# Altium PCB ESP232_USB_C_V1_2..PcbDoc (part 3 of 3)
Units mil, origin at the board's own origin, x right, y up, seen from the top; angles counter-clockwise.
Board outline 2700 x 1000 mil, 4 copper layers (L1, L2, L3, L4), stack 24.38 mil thick; 64 components, 73 nets, 299 pads, 169 vias.
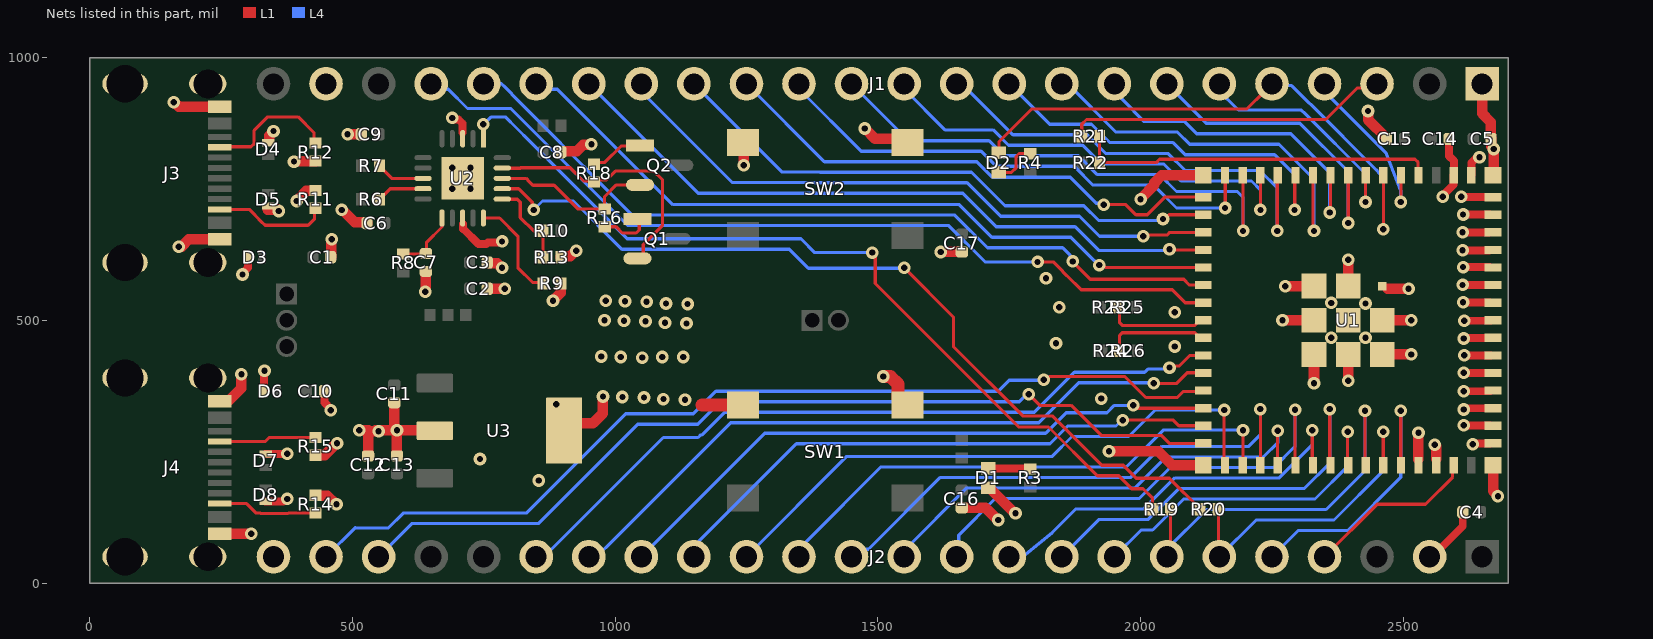
[diagram p4: the nets of this part, all layers, seen from the top]

## Via types
v1: diameter 24, hole 12, L1 to L4, tented both sides, 169 vias

## Nets (pads, with @x,y where several pads share a name; then routed paths per layer and width w, separated by ;. In a path a pad name is that pad's centre, name@x,y a point inside that pad or via, vN(x,y) a via of type N, cw(c..) or ccw(c..) an arc to the next point about the centre after c; other vN are vias at no path point) (continued)
CON_GPIO0: J1.3 R21.1 | length 616.9
  L1 w6: R21.1@1887.99,850 1887.99,872.99 1897,882 2352,882 2411.77,941.77 2441.77,941.77 J1.3@2450,950
DTR_FTDI: Q2.2 R16.1 U2.18 | length 312
  L1 w6: U2.18@785.41,770 830.71,770 837.05,763.66 843.71,757 884,757 928.99,712.01 R16.1@980,712.01 980,735 1002.6,757.6 1037.4,757.6 Q2.2@1040,755
ESP_USB_N: R23.2 R25.2 U1.23 | length 192.9
  L1 w6.03: R23.2@1960,521.87 1960,495.28 1965,490.28 2103.18,490.28 2106.72,493.82 2106.72,495.14 2111.57,500 U1.23@2119.45,500
ESP_USB_P: R24.2 R26.2 U1.24 | length 195.7
  L1 w6.03: R26.2@1959.98,441.87 1960,471.25 1965,476.25 2103.18,476.25 2106.72,472.72 2106.72,471.39 2111.57,466.54 U1.24@2119.45,466.54
FTDI_RESET: C7.2 R8.2 U2.11 | length 123.3
  L1 w6: R8.2@597,626.02 639.09,626.02 C7.2@640,626.93 ; C7.2@640.88,626.97 640.88,647.7 670.63,677.45 U2.11@670.63,694.59
FTDI_USB_N: R6.2 U2.9 | length 91.7
  L1 w6.03: R6.2@552.01,730 552.01,731.18 559.62,738.8 560.8,738.8 572.32,750.32 U2.9@634.59,750.32
FTDI_USB_P: R7.2 U2.8 | length 93.2
  L1 w6.03: R7.2@552.01,794 552.01,792.82 574.83,770 U2.8@634.59,770
GND: C1.1 C2.1 C3.1 C4.1 C5.1 C6.1 C7.1 C8.1 C9.1 C10.1 C11.1 C12.1 C13.1 C14.1 C15.1 C16.1 C17.1 D1.1 D3.1 D4.1 D5.1 D6.1 D7.1 D8.1 J1.1 J1.23 J2.2 J2.24 J3.A1B12 J3.B1A12 J3.S1 J3.S2 J3.S3 J3.S4 J4.A1B12 J4.B1A12 J4.S1 J4.S2 J4.S3 J4.S4 R9.2 R11.1 R12.1 R13.2 R14.1 R15.1 SW1.3 SW1.4 SW2.3 SW2.4 U1.1 U1.2 U1.42 U1.43 U1.46 U1.47 U1.48 U1.49 U1.50 U1.51 U1.52 U1.53 U1.54 U1.55 U1.56 U1.57 U1.58 U1.59 U1.60 U1.61 U1.62 U1.63 U1.64 U1.65 U1.66 U1.67 U1.68 U1.69 U1.70 U1.71 U1.72 U1.73 U2.3 U2.13 U2.21 U3.2 U3.4 | length 4259.2
  L1 w15: v1(291,587) 291,589.44 301.59,600.03 D3.1@301.59,615.69 ; v1@332,399 332.2,398.8 D6.1@332.2,365 ; D8.1@335,155 368.56,155 373.56,160 v1(376,160) ; D7.1@335,245.59 v1@375.59,245.59 ; C10.1@446.93,363.82 446.93,343.51 459,331.44 v1(459,329) ; v1(690,885) 692.68,882.32 701.81,882.32 710,874.14 U2.3@710,856.94 ; U2.13@711,683 711,674 740,645 755,645 758.28,648.28 783.28,648.28 v1(785,650) ; C15.1@2468.07,845 C15.1@2468.07,846.18 ; 2575,70 2613.07,108.07 C4.1@2613.07,135 ; v1(2575,735) 2575,737.44 2595.45,757.89 2595.45,775.22 U1.2@2595.83,775.59 ; C14.1@2586.93,845 2586.93,812.56 2596.2,803.29 U1.2@2596.2,775.96 ; v1(2610,735) 2610.37,734.63 2663.45,734.63 U1.60@2664.08,734 ; v1@2612.92,567 U1.55@2663.08,567 ; v1@2612.92,633 U1.57@2663.08,633 ; v1@2612.92,667 U1.58@2663.08,667 ; v1@2613.92,534 U1.54@2664.08,534 ; v1@2613.92,601 U1.56@2664.08,601 ; v1@2613.92,701 U1.59@2664.08,701 ; v1(2614.7,330.22) 2617.17,332.68 U1.48@2670.63,332.68 ; v1(2614.7,465.22) 2616.02,466.54 U1.52@2670.63,466.54 ; v1@2614.92,300 U1.47@2665.08,300 ; v1@2614.92,365 U1.49@2665.08,365 ; v1@2614.92,400 U1.50@2665.08,400 ; v1@2615.92,433 U1.51@2666.08,433 ; v1@2615.92,499 U1.53@2666.08,499 ; U1.1@2629.29,775.59 2629.67,775.96 2629.67,799.67 2640,810 v1(2645,810) ; v1(2632,264) 2633.37,265.37 U1.46@2665.08,265.37
  L1 w20: v1(160,915) 161.08,915 170.18,905.91 J3.A1B12@247.64,905.91 ; v1(170,640) 175,640 188.94,653.94 J3.B1A12@247.64,653.94 ; J4.B1A12@247.64,94.09 306.91,94.09 v1@307,94 ; J4.A1B12@247.64,346.06 249.45,347.87 265.87,347.87 289,371 v1(289,397) ; D5.1@339.23,710.77 357.23,710.77 v1(360,708) ; 341.81,847 341.81,850.73 350,858.92 v1(350,860) ; v1(389,802) 389.5,802.5 429.5,802.5 R12.1@430,802.99 ; v1(394,727) 394,727.72 412.66,746.38 429.37,746.38 R11.1@430,747.01 ; R14.1@429.48,167.01 430.11,166.38 452.54,166.38 468.92,150 v1(470,150) ; R15.1@430,242.99 430.63,243.62 447.54,243.62 469.92,266 v1(471,266) ; C1.1@459.49,621.18 459.49,651.41 461,652.92 v1(461,654) ; v1(480,710) 481.08,710 504.27,686.81 527.44,686.81 528.07,686.18 C6.1@528.07,685 ; v1(491,854) C9.1@517.07,854 ; v1(513,291) 513.5,290.5 530,290.5 ; C12.1@530,241.93 530,289 v1(550,289) ; v1@545,290.5 v1@585,290.5 ; C11.1@580,343.07 580,297.08 585,292.08 v1(585,291) v1@585,290.5 ; C13.1@585,241.93 v1@585,290.5 ; v1(639,554) 639.5,554.5 639.5,592.57 C7.1@640,593.07 ; U3.2@656.97,290 656.47,290.5 v1@585,290.5 ; C2.1@756.93,560 v1(790,560) ; C3.1@756.93,610 756.93,608.82 757.56,608.19 775.73,608.19 783.92,600 v1(785,600) ; v1(882,537) 882,538.08 896.38,552.46 896.38,569.37 R9.2@897.01,570 ; C8.1@896.93,820 896.93,821.18 897.56,821.81 926.81,821.81 939.23,834.23 954.23,834.23 v1(955,835) ; R13.2@897.01,620 897.01,621.18 897.64,621.81 914.73,621.81 924.92,632 v1(926,632) ; U3.4@903.03,290 917.03,304 958,304 977,323 v1(977,355) ; SW2.4@1243.5,838.58 1245,837.09 v1(1245,795) ; v1(1475,865) 1495,845 1550.08,845 SW2.3@1556.5,838.58 ; v1(1620,630) C17.1@1660,630 ; C16.1@1660,143.07 1704.85,143.07 1727.92,120 v1(1729,120) ; D1.1@1710,181.3 1711.81,179.49 1713.78,179.49 1759.33,133.93 1761.07,133.93 v1(1762,133) ; v1(1940,251) 2034,251 2060.59,224.41 U1.64@2119.45,224.41 ; v1(2000,730) 2000,731.08 2026.45,757.53 2026.45,761.45 2040.59,775.59 U1.63@2119.45,775.59 ; v1(2270,500) U1.72@2330.08,500 ; v1(2275,565) v1(2275,565) U1.71@2330.08,564.96 ; v1@2330,390 2330,434.96 U1.73@2330.08,435.04 ; v1(2395,385) 2395,390 2395.04,390.04 U1.70@2395.04,435.04 ; v1(2395,615) v1(2395,615) U1.69@2395.04,564.96 ; v1(2432.77,898.23) 2432.77,881.49 C15.1@2468.07,846.18 ; U1.68@2460,435.04 v1(2514.96,435.04) v1(2514.96,435.04) ; U1.67@2460,500 v1(2515,500) ; 2470,560 v1@2500,560 ; U1.42@2528.71,235.63 v1@2528.71,285.78 ; v1(2560,263) 2560,262.84 2562.68,260.16 U1.43@2562.68,236.53 ; J1.1@2650,950 2650,893.5 2666.3,877.2 2666.3,846.81 2666.93,846.18 C5.1@2666.93,845 ; C5.1@2667.56,844.37 2667.56,831.52 2672,827.08 v1(2672,826) 2672,776.96 U1.62@2670.63,775.59 ; U1.65@2670.63,224.41 2670.63,175.45 2680,166.08 v1(2680,165)
  L1 w25: 1166,338.58 SW1.4@1243.5,338.58 ; v1(1510.5,393) 1523.84,393 1538.48,378.36 1538.48,351.67 1551.57,338.58 SW1.3@1556.5,338.58
  other v1: 308,94 855,195 743,236 376,246 2528.93,286 2614.7,300.22 888,340 1133,349 1092,350 1925,351 1055,353 1014,354 2614.7,365.22 2330,380 2614.7,400.22 333,404 1052,429 1011,430 1090,430 1130,430 974,431 2615.7,433.22 2065,450 1839,456 2363,467 2428,467 1136,494 1095,495 1058,498 1017,499 2615.7,499.22 980,500 2065,515 1845,525 1138,531 1097,532 2428,532 2363,533 2613.7,534.22 1060,535 1019,536 982,537 2510,560 2612.7,567.22 1820,580 2613.7,601.22 2612.7,633.22 2612.7,667.22 2613.7,701.22 690,750 725,750 690,790 725,790
GPIO0: R21.2 R22.2 U1.4 | length 686.3
  L1 w6: R21.2@1922.01,850 R22.2@1922.01,800 2029.64,800 2035.98,806.34 2522.21,806.34 2528.07,800.48 2528.07,776.42 U1.4@2528.9,775.59
GPIO1: J1.4 U1.5 | length 329.6
  L1 w6: v1(2495,725) 2495.22,725.22 2495.22,775.37 U1.5@2495.43,775.59
  L4 w6: J1.4@2350,950 2350,935.39 2365.73,919.65 2365.73,919.27 2467.34,817.66 2468.1,815.72 2495,747.06 v1(2495,725)
GPIO2: D2.1 J1.5 U1.6 | length 1054.2
  L1 w6: D2.1@1730,818.7 1730.65,819.35 1730.65,839.65 1793,902 2202,902 2235,935 J1.5@2256,935 ; v1(2462,673) U1.6@2462.04,763.59
  L4 w6: J1.5@2250,950 2257.86,950 2261.38,946.48 2287.49,946.48 2320.75,913.21 2321.36,913.21 2323.72,910.84 ; 2323.73,910.84 2448.07,786.5 2462,770.67 v1@2462,680
GPIO3: J1.6 U1.7 | length 460.6
  L1 w6: v1@2428.29,725.22 U1.7@2428.29,775.37
  L4 w6: J1.6@2150,950 2150,936 2183.07,902.93 2186,900 2305.4,900 ccw(c2350,950) 2306.55,899 2310.15,896.14 2315.51,890.78 2428.07,778.21 v1(2428.07,725)
GPIO4: J1.7 U1.8 | length 602.8
  L1 w6: v1(2395,685) v1(2395,685) U1.8@2395.04,775.59
  L4 w6: J1.7@2050,950 2125,875 2303,875 2395,783 v1(2395,685)
GPIO5: J1.8 U1.9 | length 636
  L1 w6: v1(2360,705) 2361.57,706.57 U1.9@2361.57,775.59
  L4 w6: J1.8@1950,950 1950,935.39 1965.73,919.65 1965.73,919.27 2007,878 2084,878 2107,855 2286,855 2360,781 v1(2360,705)
GPIO6: J1.9 U1.10 | length 759.9
  L1 w6: U1.10@2328.11,775.59 2328.11,671.89 v1(2330,670)
  L4 w6: J1.9@1850,950 1861.12,950 1953.12,858 2070.28,858 2093.28,835 2263.28,835 2330,768.28 v1(2330,670)
GPIO7: J1.10 U1.11 | length 731.8
  L1 w6: v1@2293.29,710.22 U1.11@2293.29,760.37
  L4 w6: J1.10@1750,950 1827,873 1906.71,873 1941.71,838 2062,838 2085,815 2255,815 2293.07,776.93 v1(2293.07,710)
GPIO8: J1.11 U1.12 | length 864.6
  L1 w6: v1(2260,670) U1.12@2260.04,760.59
  L4 w6: J1.11@1650,950 1660,950 1757,853 1898.42,853 1934.31,817.11 2052.89,817.11 2085,785 2227,785 2260,752 v1(2260,670)
GPIO9: J1.12 U1.13 | length 855.8
  L1 w6: v1@2228.29,710.22 U1.13@2228.29,760.37
  L4 w6: J1.12@1550,950 1550,940 1627.64,862.36 1719.36,862.36 1748.72,833 1890.14,833 1926.03,797.11 2044.61,797.11 2076.72,765 2211.14,765 2228.07,748.07 v1(2228.07,710)
GPIO10: J1.13 U1.14 | length 989.1
  L1 w6: v1(2195,670) U1.14@2195.04,760.59
  L4 w6: J1.13@1450,950 1558.3,841.7 1711.73,841.7 1740.43,813 1881.85,813 1917.74,777.11 2036.32,777.11 2068.43,745 2184.14,745 2195,734.14 v1(2195,670)
GPIO11: J1.14 U1.15 | length 964.7
  L1 w6: v1@2161,713.92 U1.15@2161,764.08
  L4 w6: J1.14@1350,950 1350,940 1468.3,821.7 1696.58,821.7 1725.28,793 1873,793 1874,792 1874.57,792 1909.46,757.11 2025,757.11 2068.4,713.7 v1(2160.78,713.7)
GPIO12: J1.15 U1.16 | length 986.6
  L1 w6: v1(1930,720) 1971.82,720 1991.08,700.73 2012.55,700.73 2046.07,734.25 U1.16@2119.45,734.25
  L4 w6: J1.15@1250,950 1398.3,801.7 1688.3,801.7 1718,772 1866.28,772 1915.61,722.68 1927.32,722.68 v1(1930,720)
GPIO13: J1.16 U1.17 | length 1081.6
  L1 w6: v1(2042.68,692.68) 2046.47,692.68 2054.58,700.79 2072,700.79 U1.17@2119.45,700.79
  L4 w6: J1.16@1150,950 1318,782 1389.72,782 1390.01,781.7 1678.3,781.7 1742,718 1892,718 1920,690 2040,690 v1(2042.68,692.68)
GPIO14: J1.17 U1.18 | length 1201.2
  L1 w6: v1(2005,660) 2007,662 2050.18,662 2055.51,667.32 U1.18@2119.45,667.32
  L4 w6: J1.17@1050,950 1050,935.39 1223.39,762 1379.72,762 1380.01,761.7 1670.01,761.7 1733.72,698 1883.72,698 1921.72,660 v1(2005,660)
GPIO15: J1.18 U1.19 | length 1302.1
  L1 w6: v1(2055,635) 2056.14,633.86 U1.19@2119.45,633.86
  L4 w6: J1.18@950,950 1158.3,741.7 1661.73,741.7 1725.43,678 1875.43,678 1920.43,633 2053,633 v1(2055,635)
GPIO16: J1.19 U1.20 | length 1414.3
  L1 w6: v1(1921.21,605) 1923.89,602.32 1931.47,602.32 1933.39,600.39 U1.20@2119.45,600.39
  L4 w6: J1.19@850,950 860.33,939.67 890.33,939.67 1110,720 1655.15,720 1717.15,658 1867.15,658 1912.15,613 1913.21,613 v1(1921.21,605)
GPIO17: J1.20 U1.21 | length 1533.2
  L1 w6: v1(1871,612) 1871,611 1904,578 2082,578 2093.07,566.93 U1.21@2119.45,566.93
  L4 w6: J1.20@750,950 783.99,950 789.85,944.14 816.49,917.05 ; 816.51,917.02 863,869.82 930.82,802 931.18,802 947,786.18 947,785.82 1032.82,700 1646.7,700 1708.7,638 1851.75,638 1865.93,623.81 1865.93,620.85 1871,615.79 v1(1871,612)
GPIO18: J1.21 U1.22 | length 1642.1
  L1 w6: v1(1804,611) 1834,611 1844,601 1844,600.82 1859.82,585 1860,585 1887,558 2060.18,558 2084.72,533.46 U1.22@2119.45,533.46
  L4 w6: J1.21@650,950 660.33,939.67 682.55,939.67 719.22,903 801.53,903 1024.53,680 1635,680 1704,611 v1(1804,611)
GPIO21: J2.19 U1.25 | length 1428.1
  L1 w6: v1(2055,410) 2057.68,412.68 2073.1,412.68 2093.49,433.07 U1.25@2119.45,433.07
  L4 w6: J2.19@850,50 864.61,50 880.35,65.73 880.73,65.73 1092,277 1158,277 1163,282 1165.57,282 1208.52,324.95 1797.95,324.95 1873.95,400.95 2007.77,400.95 2013.82,407 2042.14,407 2042.46,407.32 2052.32,407.32 v1(2055,410)
GPIO26: J2.18 U1.26 | length 1297.6
  L1 w6: v1(2025,380) 2068.7,380 2088.7,400 2102.71,400
  L4 w6: J2.18@960.85,56.52 971.13,56.52 982.76,68.15 983.15,68.15 1219.95,304.95 1806.24,304.95 1882.24,380.95 2024.05,380.95 v1(2025,380)
  L4 w10: J2.18@950,50 cw(c1009.04,-35.92) J2.18@960.85,56.52
GPIO33: J2.17 U1.28 | length 1190.9
  L1 w6: v1(1986,338) 1989.79,338 1995.11,332.68 U1.28@2119.45,332.68
  L4 w6: J2.17@1050,50 1284.95,284.95 1819.24,284.95 1858.28,324 1936.18,324 1950.18,338 v1(1986,338)
GPIO34: J2.16 U1.29 | length 1093.3
  L1 w6: v1(1966,310) 2062.18,310 2072.97,299.21 U1.29@2119.45,299.21
  L4 w6: J2.16@1150,50 1160.33,60.33 1160.33,80.33 1344.95,264.95 1827.52,264.95 1861.27,298.7 1953.14,298.7 1964.44,310 v1(1966,310)
GPIO35: J2.15 U1.31 | length 1137.2
  L1 w6: U1.31@2159.04,216.86 v1(2159.04,329.32)
  L4 w6: J2.15@1250,50 1441,241 1831.85,241 1869.56,278.7 1977.34,278.7 2027.95,329.32 v1(2159.04,329.32)
GPIO36: J2.14 U1.32 | length 1003.7
  L1 w6: 2194.71,240.63 v1@2194.71,290.78
  L4 w6: J2.14@1350,50 1350,64.61 1365.73,80.35 1365.73,80.73 1506,221 1973.18,221 2043.18,291 v1(2194.93,291)
GPIO37: J2.13 U1.33 | length 1013.6
  L1 w6: 2227.96,240.41 v1(2228,331)
  L4 w6: J2.13@1450,50 1464.61,50 1478.85,64.23 1482.23,64.23 1619,201 1981.47,201 2040.47,260 2206,260 2228,282 v1(2228,331)
GPIO38: J2.12 U1.34 | length 881
  L1 w6: U1.34@2260.71,239.63 v1@2260.71,289.78
  L4 w6: J2.12@1550,50 1550,62 1669,181 1989.75,181 2048.75,240 2234,240 2260.93,266.93 v1(2260.93,290)
GPIO39: J2.11 U1.35 | length 913.8
  L1 w6: U1.35@2293.96,239.41 v1(2294,330)
  L4 w6: J2.11@1650,50 1654.14,54.14 1654.14,91.14 1724,161 1998.04,161 2057.04,220 2254,220 2293,259 2294,259 v1(2294,330)
GPIO40: J2.10 U1.36 | length 740.8
  L1 w6: 2326.71,240.63 v1@2326.71,290.78
  L4 w6: J2.10@1750,50 1775.91,50 1832.16,96.16 1832.5,96.51 1838.02,102.02 1877,141 2006.32,141 2065.32,200 2264,200 2326.93,262.93 v1(2326.93,291)
GPIO41: J2.9 U1.37 | length 777.3
  L1 w6: 2359.96,240.41 v1(2360,331)
  L4 w6: J2.9@1850,50 1921,121 2014.6,121 2073.6,180 2312,180 2360,228 v1(2360,331)
GPIO42: J2.8 U1.38 | length 631.4
  L1 w6: U1.38@2393.71,237.63 v1@2393.71,287.78
  L4 w6: J2.8@1950,50 2001,101 2022.89,101 2081.89,160 2332,160 2393.93,221.93 v1(2393.93,288)
GPIO45: J2.5 U1.41 | length 525.1
  L1 w6: U1.41@2494.96,237.41 v1(2495,328)
  L4 w6: J2.5@2250,50 2300,100 2394,100 2495,201 v1(2495,328)
GPIO046: J2.4 U1.44 | length 330.3
  L1 w6: J2.4@2350,50 2450,150 2542.27,150 2593.83,201.57 2593.83,222.42 U1.44@2595.83,224.41
GPIO47: J2.23 U1.27 | length 1833.2
  L1 w6: v1(1816,387) 1819.79,387 1825.79,393 1970,393 2010,353 2069.98,353 2081.58,364.59 2117.9,364.59 U1.27@2119.45,366.14
  L4 w6: J2.23@450,50 505.5,105.5 ; 506,105 569,105 597,133 831.18,133 1020.18,322 1149,322 1191.95,364.95 1728.95,364.95 1750,386 1815,386 v1(1816,387)
GPIO48: J2.22 U1.30 | length 1749.9
  L1 w6: J2.22@550,50 J2.22@559.79,59.79 ; v1(1787,359) 1808,338 1867.82,338 1924.82,281 2039.36,281 2054.61,265.75 U1.30@2119.45,265.75
  L4 w6: J2.22@550,50 613,113 854,113 1043,302 1157.28,302 1200.24,344.95 1769.17,344.95 1783.21,359 v1(1787,359)
NetD1_2: D1.2 R3.1 | length 80.7
  L1 w15: D1.2@1710,218.7 1710.85,217.85 1789.15,217.85 R3.1@1790,217.01
NetD2_2: D2.2 R4.1 | length 87.1
  L1 w6: D2.2@1730,781.3 1754.29,781.3 1763.13,790.14 1763.13,811.15 1768.99,817.01 R4.1@1790,817.01
NetJ3_A5: J3.A5 R12.2 | length 251.9
  L1 w6: J3.A5@247.64,829.13 248.54,830.04 298,830.04 307.33,830.04 313.19,835.9 313.19,861.37 338.82,887 397,887 427.22,856.78 427.22,839.79 R12.2@430,837.01
NetJ3_B5: J3.B5 R11.2 | length 218.8
  L1 w6: J3.B5@247.64,711.02 300,711.02 303.98,711.02 314.23,700.77 314.23,700.41 328.88,685.77 329.23,685.77 334.06,680.94 415.94,680.94 428.22,693.22 428.22,711.21 R11.2@430,712.99
NetJ4_A5: J4.A5 R15.2 | length 178.6
  L1 w6: J4.A5@247.64,269.29 334.29,269.29 342,277 R15.2@423,277
NetJ4_B5: J4.B5 R14.2 | length 190.3
  L1 w6: J4.B5@247.64,151.18 298.9,151.18 300,150.09 317.09,132.99 325.19,132.99 325.68,132.5 377.88,132.5 378.38,132.99 R14.2@430,132.99
NetQ1_1: Q1.1 R16.2 | length 95.4
  L1 w6: R16.2@980,677.99 1002.01,677.99 1014,666 1040.14,666 1046,671.86 1046,686.14 1042.58,689.56 Q1.1@1042.58,692.4
NetQ2_1: Q2.1 R18.2 | length 102.2
  L1 w6: R18.2@960,797.01 963.32,800.33 980.33,800.33 1011.72,831.72 1046.89,831.72 Q2.1@1047.58,832.4
NetR9_1: R9.1 U2.15 | length 200.4
  L1 w6: U2.15@749.37,694.59 780.41,694.59 815,660 815,645 815,600 843.22,571.78 861.21,571.78 R9.1@862.99,570
RTS_FTDI: Q1.2 R18.1 U2.19 | length 493.8
  L1 w6: U2.19@785.41,789.37 820,789.37 820,790.32 914.68,790.32 940,765 R18.1@950,765 ; R18.1@960,762.99 964.15,767.14 983.86,767.14 1000.58,783.86 1073.91,783.86 1090,767.77 1090,680.17 1053.69,643.86 1053.69,623.38 1050.31,620 Q1.2@1042,620
RXD_FTDI: R19.2 U2.1 | length 1648.4
  L1 w6: U2.1@749.14,856.94 v1(749.14,872.86) ; v1(1489.26,628.79) 1489.26,625 1495,619.25 1495,570 1767.99,297.01 1824.71,297.01 1917.72,204 1958.72,204 1983.31,179.41 2004.59,179.41 2022.99,161.01 R19.2@2022.99,140
  L4 w6: v1(749.14,872.86) 750.56,872.86 764.7,887 791.33,887 813.33,865 837.05,841.28 1023.33,655 1353.79,655 1380,628.79 v1(1489.26,628.79)
TXD_FTDI: R20.2 U2.17 | length 1624.5
  L1 w6: U2.17@796.94,750.32 816.45,750.32 842.32,724.45 842.32,712.68 v1(845,710) ; v1(1550,600) 1644,506 1644,449.47 1775.47,318 1832,318 1926,224 1967,224 1991.59,199.41 2054.76,199.41 2112.99,141.18 R20.2@2112.99,140
  L4 w6: v1(845,710) 862,727 920.96,727 1012.96,635 1331.82,635 1367.82,599 1549,599 v1(1550,600)
U0RXD: J2.6 R20.1 U1.40 | length 595.3
  L1 w6: R20.1@2147.01,140 2148.5,138.5 2148.5,51.5 J2.6@2150,50 ; U1.40@2461.71,237.63 v1@2461.71,287.78
  L4 w6: J2.6@2150,50 2220,120 2368,120 2461.93,213.93 v1(2461.93,288)
U0TXD: J2.7 R19.1 U1.39 | length 750.6
  L1 w6: J2.7@2050,50 2057.01,57.01 R19.1@2057.01,140 ; U1.39@2426.96,237.41 v1(2427,328)
  L4 w6: J2.7@2050,50 2050,64 2126,140 2353,140 2427,214 v1(2427,328)
VBUS_SENSE: R10.1 R13.1 U2.16 | length 157.1
  L1 w6: U2.16@795.02,730.4 795.11,730.32 813.83,730.32 815,729.14 819.68,724.46 819.68,695.32 845,670 R10.1@860,670 ; R13.1@862.99,620 R10.1@862.99,670
pads on no net: J1.24 J3.A8 J3.B8 J4.A8 J4.B8 U2.2 U2.4 U2.5 U2.6 U2.7 U2.14

## Polygon pours and split planes (outlines as drawn)
GND on L1 "GND_L01_P010" (solid, pour order 10): 1180,544 1180,554 968,554 931,517 929,517 929,512 903,486 816,486 774,444 733,444 705,416 705,355 700,350 696,354 504,354 502,352 502,235 511,226 697,226 728,257 cw(c738.57,254.36) 738.24,265.25 797,267 827,259 852.83,243.17 955,141 1160,141 1180,148 1180,161 1180,322 1180,456 1180,463 1180,468
+5V_VBUS2 on L1 "+5V_VBUS2_L01_P007" (solid, pour order 7): 353.04,465.06 356.64,468.66 358.64,470.66 381,470 385.64,467.66 cw(c5015.13,9653.95) 384.99,467.98 388.75,466.54 402.64,450.56 402.64,444.66 426.64,420.66 424.64,349.66 424.64,346.66 424.64,310.66 416.69,301.85 cw(c412.48,305.65) 410.35,300.39 cw(c417.33,317.65) 409,301 407.79,301.74 398.64,301.66 352.62,301.66 cw(c352.62,303.61) 350.67,303.64
+3V3_FTDI on L1 "+3V3_FTDI_L01_P001" (solid, pour order 1): 775,875 775,819.78 793.78,801 824,801 834,801 841,801 845.5,806 860,806 875,806 875,885 865,885 820,890 776,876
+3V3 on L1 "+3V3_L01_P000" (solid, pour order 0): 2566,895.09 2562.05,899.05 2504.42,899.55 ccw(c2504.37,895.13) 2503.73,899.5 cw(c2495.21,959.45) 2491.99,898.99 ccw(c2491.94,898.18) 2491.14,898.12 cw(c2484.16,897.52) 2491,896 cw(c2484.25,894.5) 2491,893 2491.28,885.44 ccw(c2492.37,884.52) 2491,884.9 ccw(c2501.23,882.67) 2491,880.43 2491,833 2566,833
GND on L1 "GND_L01_P009" (solid, pour order 9): 2233,378.74 ccw(c2241.2,375.68) 2235.23,369.27 ccw(c2244.35,371.42) 2240.24,363 2542,363 2542,631 2537,636 2535,634 2242,634 ccw(c2242,625) 2233,625
+5V_VBUS1 on L1 "+5V_VBUS1_L01_P006" (solid, pour order 6): 320,656 320,535 326,529 438,529 438,655 437,656
+5V on L1 "+5V_L01_P004" (solid, pour order 4): 693.49,364.92 698.49,364.92 698.49,405.92 698.49,428.73 686.21,436.56 685.37,436.17 615.77,436.81 610.99,437.44 581.96,436.68 545.49,441.8 517.45,439.67 447.95,483.31 413.49,516.92 401.49,522.92 392.49,522.92 363.49,522.92 362.49,522.92 361.49,521.92 354.49,514.92 354.49,502.92 354.49,501.92 354.49,500.92 354.49,491.69 ccw(c357.6,491.68) 356,489.01 364.49,483.92 374.49,480.92 380.49,480.92 388.49,477.92 401.49,468.92 402.49,465.92 405.49,461.92 419.49,442.92 419.49,441.8 474.97,389.63 497.11,367.49 498.49,366.92 547.49,366.92 587.71,366.71 613.53,367.92 674.49,364.92 676.87,364.2 677.93,364.41 691.7,365.1
+3V3_REG on L1 "+3V3_REG_L01_P003" (solid, pour order 3): 520,220 521,221 608,221 610,219 693,219 693,180 628,180 622,174 591,143 565,143 561,139 541,121 538,120 524.14,120.82 cw(c524.34,124.21) 520.96,123.79 cw(c569.83,152.61) 515,167.16 cw(c515.29,166.48) 515.58,167.16 515,177 515,214 519,219
+3V3_FTDI on L1 "+3V3_FTDI_L01_P002" (solid, pour order 2): 611.71,718.32 595.8,722.22 558.4,701.47 543.25,686.32 546.95,686.01 551,590 561,580 613,580 613,606 582.34,611.47 579.36,633.36 621,686.01
GND on L2 "GND_L02_P016" (solid, remove dead copper, pour order 16): 2695,10 2695,995 10,995 10,10 10,995 10,10
+3V3_REG on L2 "+3V3_REG_L02_P015" (solid, pour order 15): 724,239 724,106 516,106 516,239
+3V3 on L2 "+3V3_L02_P011" (solid, remove dead copper, pour order 11): 2681,21 2682,22 2682,982 815,982 815,926 816.57,924.43 ccw(c849,956.87) 849,911 cw(c849,899) 861,899 861,813 ccw(c886,813) 886,788 943,726 951.69,717.31 ccw(c979,744.63) 979,706 1386.17,706 cw(c1386.17,699.18) 1391,704 cw(c1376.17,675.01) 1407.16,685.01 1404,591 1401,501.8 ccw(c1434.8,501.8) 1434.8,468 1445,468 1459.58,477.11 ccw(c1449.07,493.93) 1468.9,494.11 1468,593 1468,705 1469.88,706.88 cw(c1475,701.76) 1475,709 1767.59,709 cw(c1767.59,705.59) 1770,708 1827,740 1879,789 cw(c1907.97,760.03) 1907.97,801 2477.76,801 cw(c2477.76,790.77) 2485,798 2521.29,761.71 cw(c2519.6,760.01) 2522,760 2522,532.7 ccw(c2593.7,532.7) 2527.46,505.26 cw(c2464.34,442.13) 2553.23,433.9 2545,345 2555,241.42 cw(c2455.01,241.42) 2525.71,170.71 2517,162 cw(c2490.45,188.55) 2490.44,151 2431,151 2431,24.07 ccw(c2448.07,24.07) 2436,12 cw(c2450.48,-2.48) 2450.49,18 2684,18
GND on L3 (split plane): 2699.95,0.05 0.05,0.05 0.05,999.95 2699.95,999.95

## Silkscreen, mask and mechanical layers (free items; w line width, h text height)
Top Overlay:
  lines w10: 749.05,96.22 749.05,121.22 ; 750,890 750,905 ; 1247.05,98.22 1247.05,123.22 ; 1250,880 1250,905 ; 1749.05,101.22 1749.05,126.22 ; 2245,100 2245,125 ; 2249.05,881.22 2249.05,906.22
  text "J1" at 2336,826 h40
  text "USER" at 1721,681 h40
  text "BOOT/USR" at 1246,566 h40
  text "USB1" at 436,536 h35
  text "UART" at 36,506 h40
  text "+5V" at 436,476 h40
  text "REG" at 1206,476 h40
  text "3V3" at 1486,476 h40
  text "ESP" at 36,426 h40
  text "USB2" at 436,416 h40
  text "RESET" at 1296,386 h40
  text "POWER" at 1711,261 h40
  text "J2" at 2316,126 h40
Bottom Overlay:
  text "NC" at 364,879 h40 r90
  text "GND" at 469,879 h40 r90
  text "5V" at 574,879 h40 r90
  text "IO17" at 764,879 h40 r90
  text "IO16" at 869,879 h40 r90
  text "IO15" at 969,879 h40 r90
  text "IO14" at 1069,879 h40 r90
  text "IO13" at 1174,879 h40 r90
  text "IO12" at 1274,879 h40 r90
  text "IO11" at 1369,879 h40 r90
  text "IO10" at 1474,879 h40 r90
  text "IO9" at 1574,879 h40 r90
  text "IO8" at 1669,879 h40 r90
  text "IO7" at 1774,879 h40 r90
  text "IO6" at 1874,879 h40 r90
  text "IO5" at 1979,879 h40 r90
  text "IO4" at 2084,879 h40 r90
  text "IO3" at 2184,879 h40 r90
  text "IO2" at 2264,879 h40 r90
  text "IO1" at 2369,879 h40 r90
  text "IO0" at 2469,879 h40 r90
  text "3V3" at 2559,879 h40 r90
  text "GND" at 2674,879 h40 r90
  text "IO18" at 674,874 h40 r90
  text "<---PIN1--->" at 2674,744 h40 r90
  text "(C) GADILINGAREDDY G M" at 1919,421 h40
  text "ESP32 WITH USB-C" at 1774,356 h40
  text "IO47" at 479,274 h40 r90
  text "GND" at 374.44,270.82 h40 r90
  text "IO48" at 579.44,270.82 h40 r90
  text "USB+" at 779.44,270.82 h40 r90
  text "IO34" at 1169.44,270.82 h40 r90
  text "USB-" at 674,269 h40 r90
  text "IO21" at 884,269 h40 r90
  text "IO26" at 984,269 h40 r90
  text "IO33" at 1079,269 h40 r90
  text "EN" at 2479,269 h40 r90
  text "IO36" at 1374.44,265.82 h40 r90
  text "GND" at 2579.44,265.82 h40 r90
  text "IO35" at 1274,264 h40 r90
  text "IO37" at 1469,264 h40 r90
  text "IO39" at 1679,264 h40 r90
  text "IO40" at 1779,264 h40 r90
  text "IO41" at 1869,264 h40 r90
  text "IO42" at 1974,264 h40 r90
  text "TXD" at 2079,264 h40 r90
  text "RXD" at 2179,264 h40 r90
  text "IO45" at 2274,264 h40 r90
  text "IO46" at 2379,264 h40 r90
  text "3V3" at 2674,264 h40 r90
  text "IO38" at 1569.44,260.82 h40 r90
Top Solder:
  region: 1880 vertices and 0 holes, not listed, extent 832.04,430.34 875.65,491.62
Board Shape:
  the board outline again, w10

## Text inside footprints (layer, text, board x,y; h text height)
J1: Bottom Overlay "1" at 2621,1021 h40 r270
J2: Bottom Overlay "1" at 2627,-34 h40 r270
J5: Top Overlay "1" at 301,531 h40